# Altium PCB 175-00002 rev 3, PCB, Sinistro Clock Gen.PcbDoc (part 3 of 6)
Units mil, origin at the board's own origin, x right, y up, seen from the top; angles counter-clockwise.
Board outline 5905.51 x 4330.71 mil, 10 copper layers (Top Layer (.GTL), MidLayer1 (*.G1), +12V (*.GP1), -12V (*.GP2), A & GND (*.GP3), Chassis E (*.GP4), +28V & VCC (*.GP5), MidLayer2 (*.G2), MidLayer3 (*.G3), Bottom Layer (.GBL)), stack 64.6 mil thick; 502 components, 332 nets, 1948 pads, 915 vias.
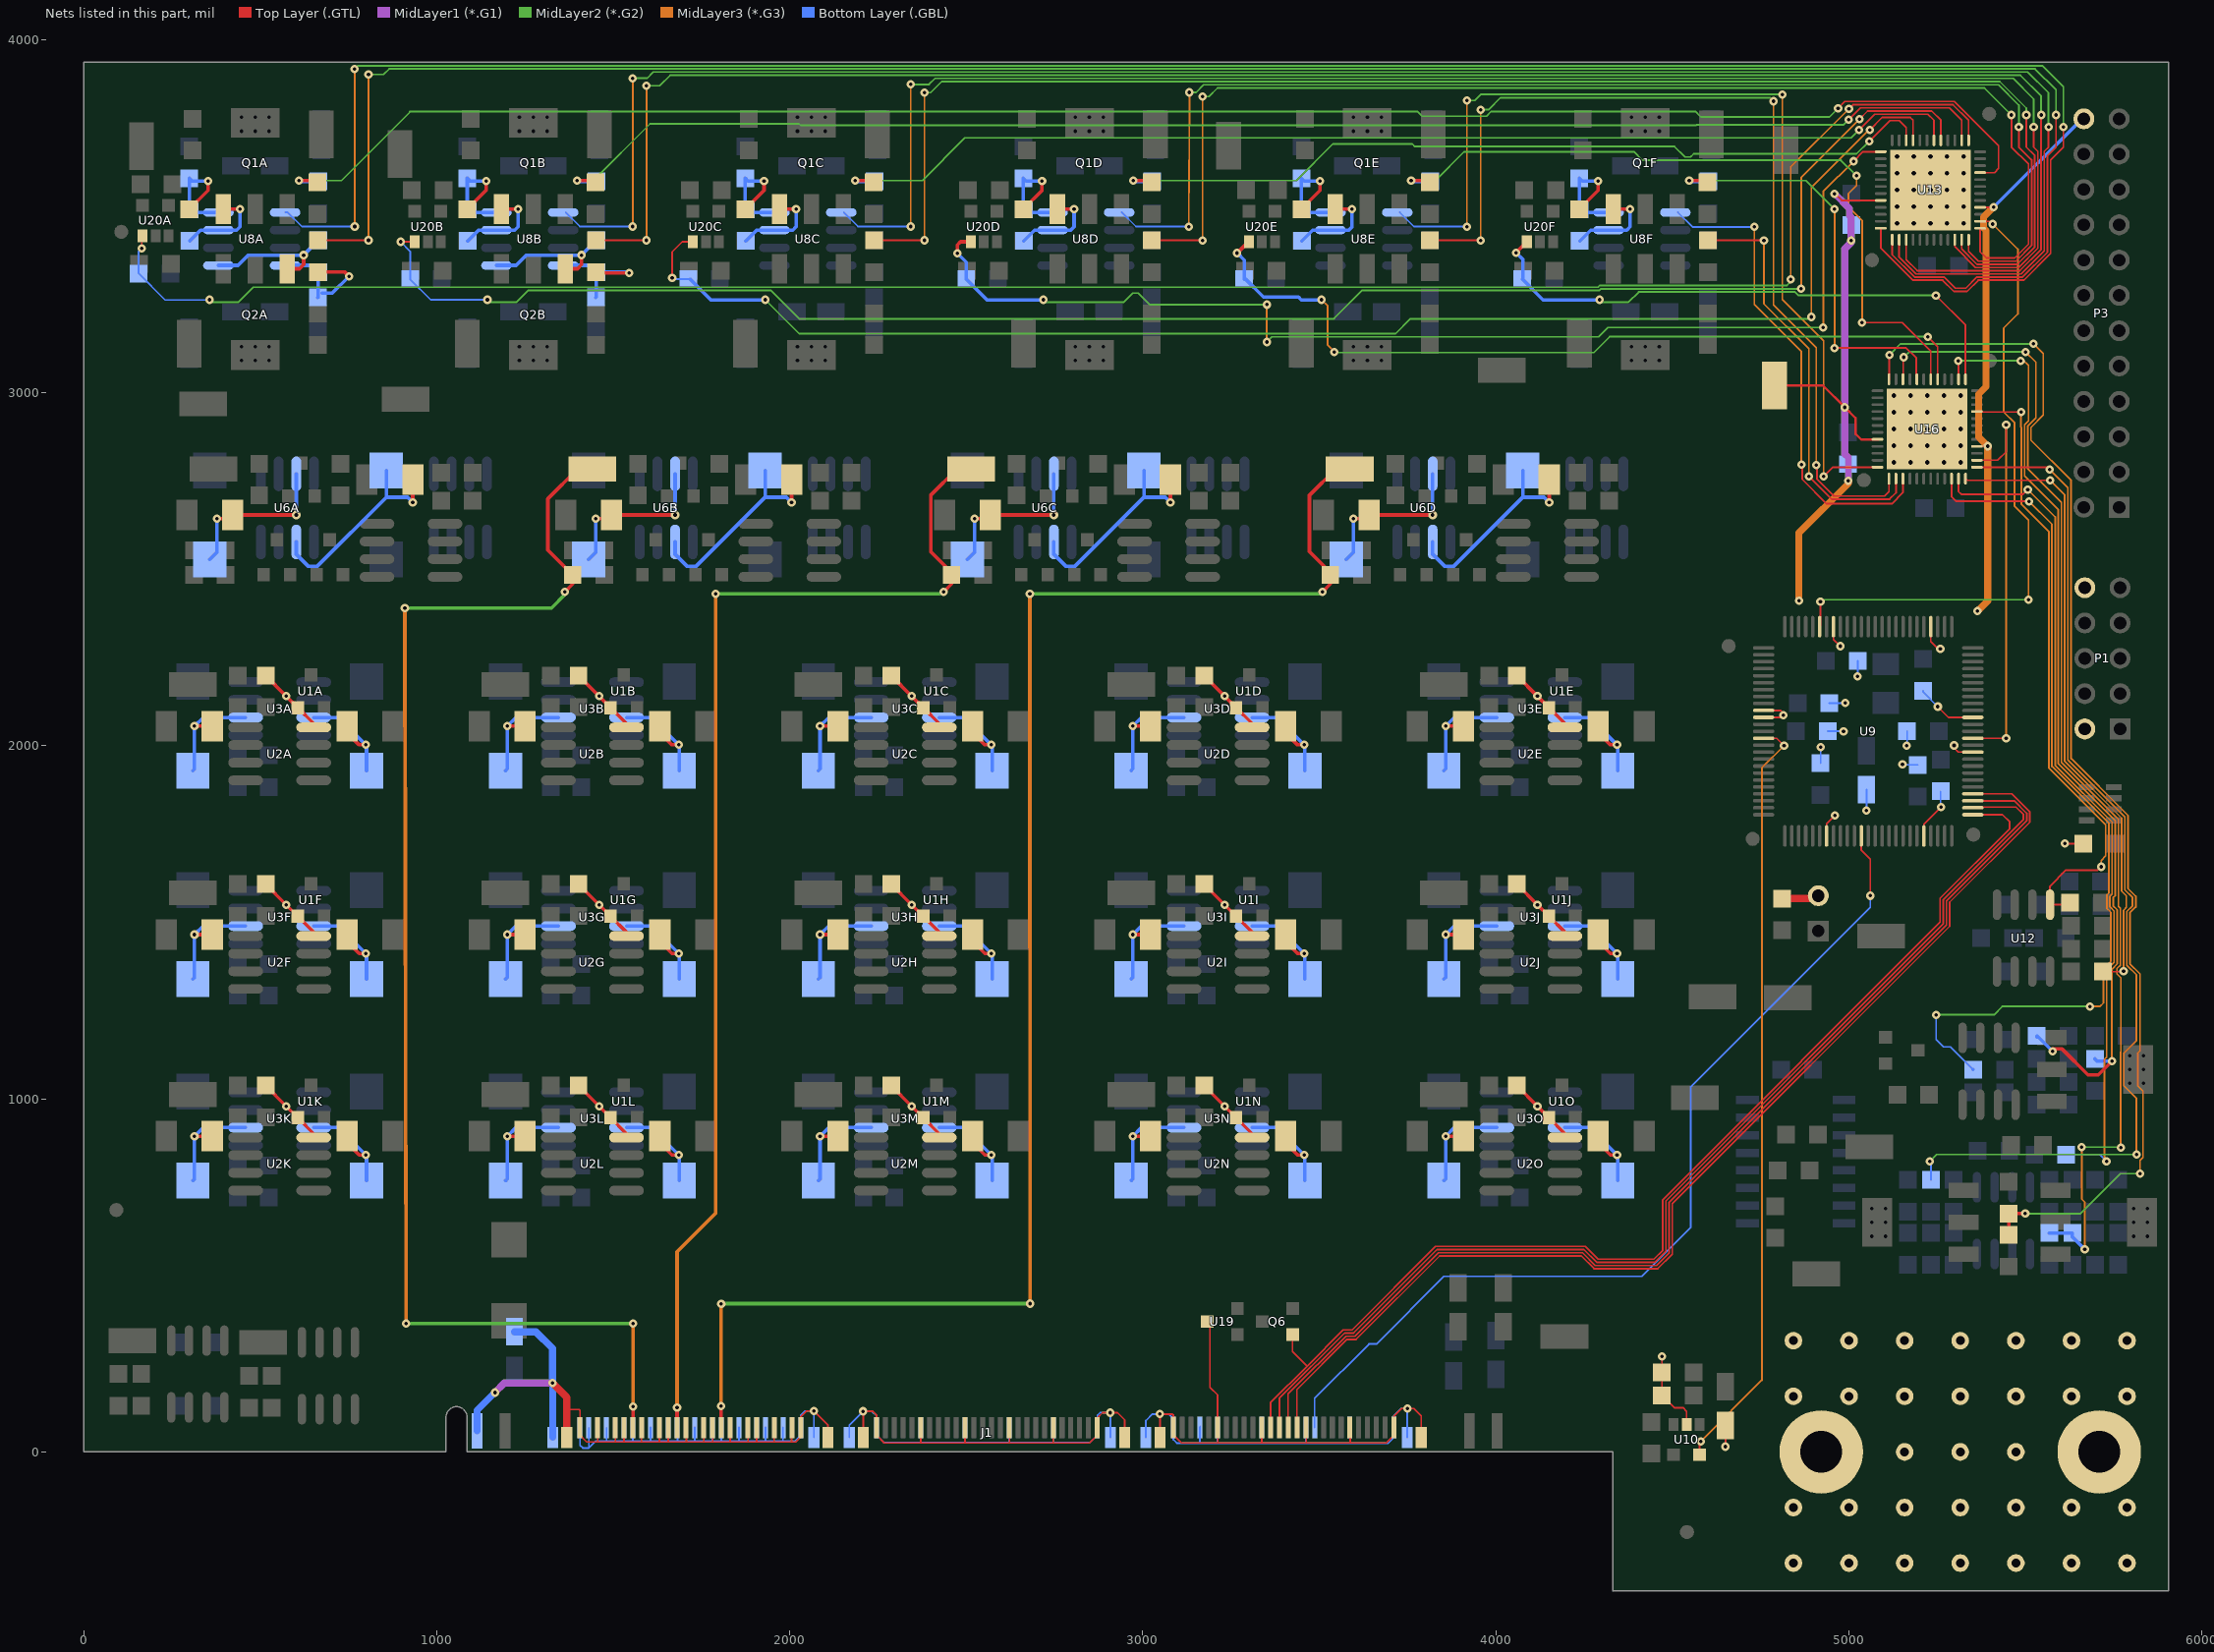
[diagram p11: the nets of this part, all layers, seen from the top]

## Via types
v1: diameter 24, hole 10, Top Layer (.GTL) to Bottom Layer (.GBL), 915 vias

## Nets (pads, with @x,y where several pads share a name; then routed paths per layer and width w, separated by ;. In a path a pad name is that pad's centre, name@x,y a point inside that pad or via, vN(x,y) a via of type N, cw(c..) or ccw(c..) an arc to the next point about the centre after c; other vN are vias at no path point) (continued)
CDO17: J1.143 R4B.2 TP4B.1 | length 3900.4
  Top Layer (.GTL) w10: v1(1362.83,2435) 1385.24,2457.4 R4B.2@1385.24,2483.31 1315,2553.54 1315,2699 1399.31,2783.31 TP4B.1@1440.24,2783.31 ; J1.143@1556,68.09 v1(1556,128)
  MidLayer2 (*.G2) w10: v1(910,2390) 1325,2390 v1@1365,2430 ; v1(913,363) 1515,363 1516,364 v1(1556,364)
  MidLayer3 (*.G3) w10: v1(910,2390) v1(913,363) ; v1(1556,128) v1(1556,364)
CDO18: J1.133 R4C.2 TP4C.1 | length 3509.6
  Top Layer (.GTL) w10: J1.133@1681,68.09 v1(1681,126) ; v1(2435.67,2435) 2458.07,2457.4 R4C.2@2458.07,2483.31 2458.07,2490.58 2399.07,2549.58 2399.07,2709.01 2473.37,2783.31 TP4C.1@2513.07,2783.31
  MidLayer2 (*.G2) w10: v1(1790,2430) v1@2440,2430
  MidLayer3 (*.G3) w10: v1(1681,126) 1681,532 1681,567 1790,676 v1(1790,2430)
CDO19: J1.123 R4D.2 TP4D.1 | length 4519.2
  Top Layer (.GTL) w10: v1(1805,130) 1806,129 J1.123@1806,68.09 ; v1(3508.5,2435) 3530.91,2457.4 R4D.2@3530.91,2483.31 3530.91,2490.58 3471.91,2549.58 3471.91,2709.01 3546.21,2783.31 TP4D.1@3585.91,2783.31
  MidLayer2 (*.G2) w10: v1@1806,420 v1(2681,420) ; v1(2680,2430) v1@3510,2430
  MidLayer3 (*.G3) w10: v1(1805,130) 1805,418 v1(1806,419) ; v1(2680,2430) v1(2681,420)
CLK_100: U9.14 U10.5 | length 2173.5
  Top Layer (.GTL) w5: U10.5@4577,-8 4577,27 v1(4580,30) ; U9.14@4758.15,2020.95 4795.05,2020.95 v1(4816,2000)
  MidLayer3 (*.G3) w5: v1(4580,30) 4753,203 4753,1937 v1(4816,2000)
DAC_HI1: U8A.1 U13.12 | length 6647.7
  Top Layer (.GTL) w5: U13.12@5089.74,3465.22 5089.74,3410.08 5181.82,3318 5265.27,3318 5296.77,3286.5 5334.5,3286.5 5366,3318 5495.1,3318 5571,3393.9 5571,3659 5607,3695 v1(5607,3752)
  MidLayer2 (*.G2) w5: v1(767,3916) 776.5,3925.5 5547.39,3925.5 5607,3865.89 v1(5607,3752)
  MidLayer3 (*.G3) w5: v1(767,3916) 768,3915 v1(768,3470)
  Bottom Layer (.GBL) w5: U8A.1@570.94,3510.04 578.34,3510.04 618.38,3470 v1(768,3470)
DAC_HI2: U8B.1 U13.14 | length 5634.2
  Top Layer (.GTL) w5: U13.14@5141.9,3432.74 5141.9,3383.37 5189.27,3336 5487.64,3336 5553,3401.36 5553,3683 5565,3695 v1(5565,3752)
  MidLayer2 (*.G2) w5: v1(1555.4,3890) 1596,3890 1613.5,3907.5 5505.99,3907.5 5565,3848.49 v1(5565,3752)
  MidLayer3 (*.G3) w5: v1@1548,3890 v1(1555.4,3890) v1(1555.4,3470)
  Bottom Layer (.GBL) w5: U8B.1@1365.74,3510.04 1405.78,3470 v1(1555.4,3470)
DAC_HI3: U8C.1 U13.22 | length 4549.8
  Top Layer (.GTL) w5: U13.22@5299.38,3432.74 5299.38,3413.16 5358.54,3354 5480.18,3354 5535,3408.82 5535,3683 5523,3695 v1(5523,3752)
  MidLayer2 (*.G2) w5: v1(2342.8,3872.49) 2394.49,3872.49 2411.5,3889.5 5464.59,3889.5 5523,3831.1 v1(5523,3752)
  MidLayer3 (*.G3) w5: v1(2342.8,3470) v1(2342.8,3872.49)
  Bottom Layer (.GBL) w5: U8C.1@2153.14,3510.04 2193.18,3470 v1(2342.8,3470)
DAC_HI4: U8D.1 U13.24 | length 3622
  Top Layer (.GTL) w5: U13.24@5338.75,3432.74 5338.75,3399.25 5366,3372 5472.73,3372 5517,3416.27 5517,3659 5481,3695 v1(5481,3752)
  MidLayer2 (*.G2) w5: v1(3132,3850) 3151,3850 3172.5,3871.5 5423.2,3871.5 5481,3813.7 v1(5481,3752)
  MidLayer3 (*.G3) w5: v1(3130.4,3469.78) v1(3132,3850)
  Bottom Layer (.GBL) w5: U8D.1@2940.54,3510.04 2980.58,3470 v1@3130.2,3470
DAC_HI5: U8E.1 U16.12 | length 2757.9
  Top Layer (.GTL) w5: v1(4928,2762) 4954.48,2788.48 U16.12@5080.74,2788.48
  MidLayer2 (*.G2) w5: v1(3917.8,3827) 3940,3827 3957,3844 v1(4811,3844)
  MidLayer3 (*.G3) w5: v1(3917.8,3469.78) v1(3917.8,3827) ; v1(4811,3844) 4811,3264 4928,3147 v1(4928,2762)
  Bottom Layer (.GBL) w5: U8E.1@3727.94,3510.04 3767.98,3470 v1@3917.61,3470
DAC_HI6: U8F.1 U16.15 | length 1370.7
  Top Layer (.GTL) w5: v1(4865,2796) 4867.5,2793.5 4867.5,2754.34 4936.84,2685 5121,2685 5152.59,2716.59 U16.15@5152.59,2756
  MidLayer3 (*.G3) w5: v1(4732,3469) 4732,3249 4865,3116 v1(4865,2796)
  Bottom Layer (.GBL) w5: U8F.1@4515.34,3510.04 4556.38,3469 v1(4732,3469)
DAC_LO1: R10A.2 U13.13 | length 6456.9
  Top Layer (.GTL) w5: R10A.2@663.46,3430.83 806.83,3430.83 v1(807,3431) ; U13.13@5122.22,3432.74 5122.22,3390.32 5185.54,3327 5269,3327 5300.5,3295.5 5330.77,3295.5 5362.27,3327 5491.37,3327 5562,3397.63 5562,3671 5586,3695 v1(5586,3786)
  MidLayer2 (*.G2) w5: v1(807,3901) 850,3901 865.5,3916.5 5526.69,3916.5 5586,3857.19 v1(5586,3786)
  MidLayer3 (*.G3) w5: v1(807,3431) v1(807,3901)
DAC_LO2: R10B.2 U13.15 | length 5478.8
  Top Layer (.GTL) w5: R10B.2@1450.87,3430.83 v1@1594.23,3430.83 ; U13.15@5161.59,3432.74 5161.59,3376.41 5193,3345 5483.91,3345 5544,3405.09 v1(5544,3786)
  MidLayer2 (*.G2) w5: v1(1594.4,3869) 1632,3869 1661.5,3898.5 5485.29,3898.5 5544,3839.79 v1(5544,3786)
  MidLayer3 (*.G3) w5: v1(1594.4,3431) v1(1594.4,3869)
DAC_LO3: R10C.2 U13.23 | length 4400.4
  Top Layer (.GTL) w5: R10C.2@2238.27,3430.83 v1@2381.63,3430.83 ; U13.23@5319.07,3432.74 5319.07,3406.2 5362.27,3363 5476.46,3363 5526,3412.54 5526,3671 5502,3695 v1(5502,3786)
  MidLayer2 (*.G2) w5: v1(2381.8,3849) 2399,3849 2430.5,3880.5 5426.93,3880.5 5502,3805.43 v1(5502,3786)
  MidLayer3 (*.G3) w5: v1(2381.8,3431) v1(2381.8,3849)
DAC_LO4: R10D.2 U13.25 | length 3495.6
  Top Layer (.GTL) w5: R10D.2@3025.67,3430.83 v1@3169.03,3430.83 ; U13.25@5371.24,3465.22 5371.24,3398.76 5389,3381 5469,3381 5508,3420 5508,3647 5460,3695 v1(5460,3786)
  MidLayer2 (*.G2) w5: v1(3169.4,3838) 3187,3838 3211.5,3862.5 5383.5,3862.5 v1(5460,3786)
  MidLayer3 (*.G3) w5: v1(3169.4,3430.78) v1(3169.4,3838)
DAC_LO5: R10E.2 U16.13 | length 2748
  Top Layer (.GTL) w5: R10E.2@3813.07,3430.83 v1@3956.43,3430.83 ; v1(4907,2795) 4909.5,2792.5 4909.5,2754.34 4956.84,2707 5101,2707 5113.22,2719.22 U16.13@5113.22,2756
  MidLayer2 (*.G2) w5: v1(3956.8,3801) 3979,3801 4013,3835 4776,3835 v1(4786,3825)
  MidLayer3 (*.G3) w5: v1(3956.8,3430.78) v1(3956.8,3801) ; v1(4786,3825) 4786,3248 4907,3127 v1(4907,2795)
DAC_LO6: R10F.2 U16.14 | length 1200.9
  Top Layer (.GTL) w5: R10F.2@4600.47,3430.83 v1(4759,3430.83) ; v1(4886,2762) 4950,2698 5115,2698 5132.91,2715.91 U16.14@5132.91,2756
  MidLayer3 (*.G3) w5: v1(4759,3430.83) 4759,3251 4886,3124 v1(4886,2762)
DAC_VDD: R42.1 U16.22 | length 2504
  Top Layer (.GTL) w5: U16.22@5290.39,2756 5290.39,2705.61 5304.15,2691.85 v1(5509.85,2691.85)
  MidLayer2 (*.G2) w5: v1(5246.46,1237.84) 5410.29,1237.84 5433.79,1261.34 5681.33,1261.34 v1@5682,1262
  MidLayer3 (*.G3) w5: v1(5509.85,2691.85) 5574.78,2626.92 5574.78,1940.95 5736,1779.73 5736,1583.12 5729.96,1577.07 5729.96,1539.38 5741.46,1527.88 5741.46,1389.57 5720.5,1368.62 5720.5,1271.5 5711,1262 5682.66,1262 v1(5682,1261.34)
  Bottom Layer (.GBL) w5: v1(5246.46,1237.84) 5246.46,1167.84 5267.46,1146.84 5287.46,1146.84 R42.1@5351.46,1082.84
DAC_VOD: R28.1 U16.25 | length 2941
  Top Layer (.GTL) w5: U16.25@5362.24,2788.48 5561.71,2788.48 v1(5568.59,2781.6)
  MidLayer2 (*.G2) w5: v1(5228.72,822.54) 5248.22,842.04 v1(5814,842.04)
  MidLayer3 (*.G3) w5: v1(5568.59,2781.6) 5619.78,2730.41 5619.78,1959.59 5781,1798.37 5781,1676.64 5781,1591.58 5802.96,1569.62 5802.96,1546.84 5786.46,1530.34 5786.46,1378.39 5814,1350.85 5814,1164.66 5778.38,1129.04 5778.38,1036.63 5814,1001.02 v1(5814,842.04)
  Bottom Layer (.GBL) w5: v1(5228.72,822.54) 5232.21,819.05 R28.1@5232.21,769.92
DAC_VOG: R22.1 U16.24 | length 1782.9
  Top Layer (.GTL) w5: U16.24@5329.76,2756 5334.51,2751.25 v1(5569.25,2751.25) ; R22.1@5719,1360 5776.23,1360 v1(5777.46,1361.23)
  MidLayer3 (*.G3) w5: v1(5569.25,2751.25) 5610.78,2709.71 5610.78,1955.86 5772,1794.64 5772,1587.85 5785,1574.85 5785,1541.61 5777.46,1534.06 v1(5777.46,1361.23)
DAC_VRD: R48.1 U16.23 | length 2385.8
  Top Layer (.GTL) w5: U16.23@5310.07,2756 5310.07,2719.93 5318,2712 5493,2712 v1(5506.2,2725.2)
  MidLayer2 (*.G2) w5: v1@5728.54,822.54 v1(5729,823)
  MidLayer3 (*.G3) w5: v1(5506.2,2725.2) 5583.78,2647.62 5583.78,1944.67 5745,1783.46 5745,1579.39 5738.96,1573.35 5738.96,1543.11 5750.46,1531.61 5750.46,1385.85 5729.5,1364.89 5729.5,1118.04 5722.96,1111.5 5722.96,829.04 v1(5729,823)
  Bottom Layer (.GBL) w5: R48.1@5615,842.04 5709.96,842.04 v1(5729,823)
DRV_SEL_N: J1.29 Q6.1 U9.51 | length 3269.6
  Top Layer (.GTL) w5: J1.29@3361.5,69.15 3361.5,139.58 3464.96,243.04 ; Q6.1@3424,332 3424,284 3464.96,243.04 ; 4472.5,612.5 4472.5,571.34 ; U9.51@5350.67,1804.41 5434.59,1804.41 5455.09,1783.91 5455.09,1764.91 5258,1567.82 5258,1499.82 4472.5,714.32 4472.5,571.34 ; 3464.96,243.04 3567.43,345.5 3592.9,345.5 3829.27,581.87 4252.95,581.87 4288.82,546 4447.16,546 4472.5,571.34
E: pad.0 pad.1 pad.2 pad.3 pad.4 pad.5 U13.0 U16.0
GND: C7.2 C12.1 C16.1 C17.1 C18.1 C19.1 C20.1 C21.1 C23.1 C24.1 C26.1 C31.1 C32.2 C34.1 C36.1 C55.2 C56.2 J1.1 J1.2 J1.11 J1.12 J1.21 J1.22 J1.31 J1.32 J1.41 J1.42 J1.46 J1.51 J1.52 J1.53 J1.54 J1.63 J1.64 J1.73 J1.74 J1.83 J1.84 J1.93 J1.94 J1.103 J1.104 J1.105 J1.106 J1.107 J1.110 J1.111 J1.114 J1.115 J1.116 J1.117 J1.120 J1.121 J1.124 J1.125 J1.126 J1.127 J1.130 J1.131 J1.134 J1.135 J1.136 J1.137 J1.140 J1.141 J1.144 J1.145 J1.146 J1.147 J1.150 J1.151 J1.154 J1.155 J1.156 J1.157 J1.158 J1.159 J1.160 J1.161 J1.162 J1.163 J1.164 J1.165 J1.166 J1.167 J1.168 J1.PC08 P1.2 P1.10 P2.2 P3.24 TP15.1 U9.10 U9.11 U9.32 U9.46 U9.60 U9.65 U9.79 U9.93 U10.2 U13.8 U13.28 U16.8 U16.28 U19.3 | length 14068.1
  Top Layer (.GTL) w5: 1368.5,120 1403,120 1406,117 J1.155@1406,68.09 1403,65.08 1403,49.9 1424.9,28 1456,28 ; J1.151@1456,68.09 1456,28 ; J1.147@1506,46.9 J1.147@1506,68.09 1506,28.01 ; J1.145@1531,68.09 1531,28 ; J1.141@1580,68.09 1580,28 ; J1.137@1631,68.09 1631,28 ; J1.135@1656,68.09 1656,28 ; J1.131@1707,68.09 1707,28 ; J1.127@1757,68.09 1757,28 ; J1.125@1782,68.09 1782,28 ; J1.121@1831,68.09 1831,28 ; J1.117@1882,68.09 1882,28 ; J1.115@1906,68.09 1906,28 ; J1.111@1956,68.09 1956,28 ; J1.107@2005,68.09 2005,28 ; J1.105@2031,42.01 2017,28 2005,28 ; J1.105@2031,68.09 2031,99 2048,116 v1(2068,116) 2108.5,75.5 J1.165@2108.5,41.09 ; J1.163@2208.5,41.09 2208.5,114.5 v1(2208,115) 2235,115 2246.16,103.84 J1.103@2246.16,68.09 2246.16,46.9 2267.9,25.16 2849.43,25.16 2871.16,46.9 J1.53@2871.16,68.09 2871.16,96.16 2886,111 v1(2908,111) 2928,111 2948.5,90.5 J1.161@2948.5,41.09 ; 2371,25.16 J1.93@2371,73.08 ; 2496,25.16 J1.83@2496,73.09 ; 2622,25.16 J1.73@2622,73.09 ; 2746,25.16 J1.63@2746,73.09 ; v1(3048,107) v1@3048.5,106.5 ; J1.159@3048.5,41.09 v1@3048.5,106.5 ; U19.3@3182,369 3190,361 3190,183 3211.5,161.5 J1.41@3211.5,69.15 ; J1.41@3212,74.09 3212,25.5 ; J1.31@3337,74.09 3337,25.5 ; J1.21@3463,74.09 3463,25.5 ; J1.11@3587,74.09 3587,25.5 ; J1.157@3788.5,41.09 3788.5,102.5 3768,123 v1(3749,123) 3733,123 3711.5,101.5 J1.1@3711.5,69.15 3711.5,47.96 3689.05,25.5 3587,25.5 ; v1(4470,270) C12.1@4470,225 C16.1@4470,160 4505,125 4530,125 4540,115 U10.2@4540,78 ; v1(4650,15) C7.2@4650,75 ; U9.11@4758.15,2080 4807.78,2080 v1(4814.41,2086.63) 4814.41,2091.63 4806.35,2099.69 U9.10@4758.15,2099.69 ; TP15.1@4789,3020 4878,3020 ; P2.2@4905,1567 P2.2@4913,1575 ; U9.32@4936.3,1744.37 4936.3,1778.52 v1(4960.41,1802.63) ; U9.93@4955.98,2336.89 4955.98,2301.05 v1(4975.41,2281.63) ; v1@4960,3563 4979.04,3543.96 U13.8@5089.74,3543.96 ; U9.46@5211.89,1744.37 5211.89,1777.11 v1(5260.41,1825.63) ; U9.79@5231.57,2336.89 5231.57,2294.46 5252.41,2273.63 v1(5258.41,2273.63) ; v1(5251.41,2110.63) 5282.04,2080 U9.65@5350.67,2080 ; v1(5297.41,2000.63) 5297.41,1993.63 5309.46,1981.58 U9.60@5350.67,1981.58 ; U16.28@5362.24,2847.54 5392.54,2847.54 v1(5393,2848) ; U13.28@5371.24,3524.28 5408.27,3524.28 v1(5409,3525) ; v1(5611,1723) 5611.29,1722.71 C17.1@5664,1722.71 ; 1456,28 1506,28 ; 1506,28 1531,28 ; 1531,28 1580,28 ; 1580,28 1631,28 ; 1631,28 1656,28 ; 1656,28 1707,28 ; 1707,28 1757,28 ; 1757,28 1782,28 ; 1782,28 1831,28 ; 1831,28 1882,28 ; 1882,28 1906,28 ; 1906,28 1956,28 ; 1956,28 2005,28 ; v1@3048.5,106.5 3084.5,106.5 3086.5,104.5 J1.51@3086.5,69.15 3086.5,47.96 3108.96,25.5 3212,25.5 ; 3212,25.5 3337,25.5 ; 3337,25.5 3463,25.5 ; 3463,25.5 3587,25.5
  Top Layer (.GTL) w7: TP15.1@4789,3020 4926,3020 v1(4988,2958) 5018.5,2927.5 5018.5,2882.85 5034.59,2866.76 5080.28,2866.76 U16.8@5080.74,2867.22
  Top Layer (.GTL) w20: v1(1328,195) 1368.5,154.5 1368.5,120 J1.167@1368.5,41.09 ; C56.2@4811,1567 P2.2@4905,1567
  MidLayer1 (*.G1) w20: v1(1165,168) 1192,195 v1(1328,195) ; v1(4959,3563) 5001.16,3520.84 5001.16,3501.61 ; v1(4998,2750.26) 4998,2815.77 4988,2825.77 v1(4988,2958) 4988,3406.77 v1@5006,3424.77 ; v1(5006,3430) 5006,3496.77
  MidLayer3 (*.G3) w20: v1(4858,2410) 4858,2602.33 4998,2742.33 v1(4998,2750.26) ; v1(5364,2381) 5393,2410 v1(5393,2848) 5367,2874 5367,2995.23 5388,3016.23 5388,3459.23 5381,3466.23 5381,3497 v1(5409,3525)
  Bottom Layer (.GBL) w5: J1.156@1406,68.09 1406,19 1414.01,11 1431,11 ; J1.154@1431,68.09 1431,11 ; 1481,32 J1.150@1481,68.09 ; 1531,31 J1.146@1531,69.09 ; 1556,31 J1.144@1556,69.09 ; 1606,31 J1.140@1606,70.09 ; 1656,31 J1.136@1656,69.09 ; 1682,31 J1.134@1682,68.09 ; 1731,31 J1.130@1731,69.09 ; 1781,31 J1.126@1781,69.09 ; 1806,31 J1.124@1806,69.09 ; 1856,31 J1.120@1856,69.09 ; 1906,31 J1.116@1906,69.09 ; 1931,31 J1.114@1931,70.09 ; 1981,31 J1.110@1981,70.09 ; J1.166@2068.5,41.09 2068.5,115.5 v1(2068,116) 2043,116 2031,104 J1.106@2031,68.09 2031,46.89 2015.11,31 1451,31 1431,11 ; J1.164@2168.5,41.09 2168.5,75.5 v1(2208,115) 2233,115 2246.16,101.84 J1.104@2246.16,68.09 2246.16,46.9 2267.06,26 2850.27,26 2872,47.73 2872,67.25 J1.54@2871.16,68.09 2871.16,103.16 2879,111 v1(2908,111) 2908.5,110.5 J1.162@2908.5,41.09 ; 2371,26 J1.94@2371,70.08 ; 2496,26 J1.84@2496,70.08 ; 2621,26 J1.74@2621,70.08 ; 2746,26 J1.64@2746,70.08 ; J1.160@3008.5,41.09 3008.5,88.5 3027,107 v1(3048,107) 3073,107 3086.5,93.5 J1.52@3086.5,69.15 3086.5,34.5 3096,25 3695,25 3711.5,41.5 J1.2@3711.5,69.15 3711.5,103.5 3731,123 v1(3749,123) 3748.5,122.5 J1.158@3748.5,41.09 ; 3161.5,26.5 J1.46@3161.5,69.15 ; J1.46@3162,48.45 J1.46@3162,72.08 ; 3211.5,25.5 J1.42@3211.5,69.15 ; J1.42@3212,47.46 J1.42@3212,72.08 ; 3336.5,27.5 J1.32@3336.5,69.15 ; J1.32@3337,48.45 J1.32@3337,72.08 ; J1.22@3461,48.46 J1.22@3461,72.08 ; 3461.5,26.5 J1.22@3461.5,69.15 ; J1.12@3586,47.45 J1.12@3586,72.08 ; 3586.5,25.5 J1.12@3586.5,69.15 ; C18.1@4919.41,1950.63 v1(4919.41,1995.63) ; C26.1@4939.41,2040.63 v1(4984.41,2040.63) ; C19.1@4944.41,2120.63 v1(4989.41,2120.63) ; v1@4997,2751.26 C36.1@4997,2797.26 ; v1(5006,3430) C34.1@5006,3474 ; v1(5024.41,2195.63) C23.1@5024.41,2240.63 ; v1(5049.41,1816.63) C32.2@5049.41,1875.63 ; v1(5151.41,1946.63) 5152.41,1945.63 C20.1@5194.41,1945.63 ; v1(5163.41,1999.63) 5164.41,2000.63 C31.1@5164.41,2040.63 ; C21.1@5209.41,2155.63 5209.41,2152.63 v1(5251.41,2110.63) ; C24.1@5259.41,1870.63 5259.41,1826.63 v1(5260.41,1825.63)
  Bottom Layer (.GBL) w10: v1(5409,3525) 5409.7,3525 5659.7,3775 P3.24@5665,3775
  Bottom Layer (.GBL) w20: J1.PC08@1114.6,59.15 1114.6,117.6 v1(1165,168) ; C55.2@1220,340 1281,340 1328,293 v1(1328,195) 1328.5,194.5 J1.168@1328.5,41.09
I_ADDR0: J1.23 U9.54 | length 3213
  Top Layer (.GTL) w5: J1.23@3436.5,69.15 3436.5,176.4 3578.61,318.5 3604.09,318.5 3840.45,554.87 4241.77,554.87 4277.64,519 4314,519 4458.35,519 4499.5,560.15 4499.5,703.14 5285,1488.64 5285,1556.64 5512,1783.64 5512,1812.36 5460.9,1863.47 U9.54@5350.67,1863.47
I_ADDR1: J1.25 U9.53 | length 3241.5
  Top Layer (.GTL) w5: J1.25@3411.5,69.15 3411.5,164.12 3574.88,327.5 3600.36,327.5 3836.73,563.87 4245.5,563.87 4281.37,528 4314,528 4454.62,528 4490.5,563.88 ; 4490.5,605.04 4490.5,563.88 ; U9.53@5350.67,1843.78 5467.85,1843.78 5503,1808.63 5503,1787.37 5276,1560.37 5276,1492.37 4490.5,706.87 4490.5,563.88
I_ADDR2: J1.27 U9.52 | length 3230.3
  Top Layer (.GTL) w5: J1.27@3386.5,69.15 3386.5,151.85 3571.15,336.5 3596.63,336.5 3833,572.87 4249.23,572.87 4285.1,537 4314,537 4450.89,537 4481.5,567.61 ; 4481.5,608.77 4481.5,567.61 ; U9.52@5350.67,1824.1 5352.57,1826 5472.91,1826 5494,1804.9 5494,1791.1 5267,1564.1 5267,1496.1 4481.5,710.6 4481.5,567.61
LOAD_MAX1_N: U9.95 U13.26 | length 1841.2
  Top Layer (.GTL) w5: U9.95@4916.61,2336.89 4919,2339.28 v1(4919,2408) ; U13.26@5371.24,3484.91 5399.09,3484.91 v1(5407,3477)
  MidLayer2 (*.G2) w5: v1(4919,2408) 4924,2413 v1(5508,2413)
  MidLayer3 (*.G3) w5: v1(5407,3477) 5478,3406 5478,3222.33 5438,3182.33 5438,2945.27 5469,2914.27 5469,2677.54 5508,2638.54 v1(5508,2413)
LOAD_MAX2_N: U9.62 U16.26 | length 1151.9
  Top Layer (.GTL) w5: U9.62@5350.67,2020.95 5350.72,2021 v1(5445,2021) ; U16.26@5362.24,2808.17 5420.97,2808.17 5445,2832.2 v1(5445,2909)
  MidLayer3 (*.G3) w5: v1(5445,2021) v1(5445,2909)
MON_HI1: R13A.1 R14A.2 U13.33 | length 5214
  Top Layer (.GTL) w5: v1(4969,3805) 4988,3824 5298.48,3824 5423.5,3698.98 5423.5,3634.5 5411.7,3622.7 U13.33@5371.24,3622.7
  Top Layer (.GTL) w10: v1(610.31,3600.39) 661.22,3600.39 R13A.1@663.46,3598.15
  MidLayer2 (*.G2) w5: v1(610.31,3600.39) 730.39,3600.39 923,3793 924.25,3796.03 3777.48,3796.03 3791.01,3782.5 3973.23,3782.5 3986.75,3796.03 4564.89,3796.03 4580.91,3780 4944,3780 v1(4969,3805)
  Bottom Layer (.GBL) w10: v1(610.31,3600.39) 612.56,3598.15 R14A.2@664.88,3598.15
MON_HI2: R13B.1 R14B.2 U13.38 | length 4190.6
  Top Layer (.GTL) w5: v1(4998.95,3773.05) 5031.9,3806 5284.07,3806 5319.07,3771 U13.38@5319.07,3714.24
  Top Layer (.GTL) w10: v1(1397.72,3600.39) 1448.62,3600.39 R13B.1@1450.87,3598.15
  MidLayer2 (*.G2) w5: v1(1397.72,3600.39) 1443.79,3600.39 1604.4,3761 2026.68,3761 2030.65,3757.03 4566.88,3757.03 4567.85,3758 4983.9,3758 v1(4998.95,3773.05)
  Bottom Layer (.GBL) w10: v1(1397.72,3600.39) 1399.96,3598.15 R14B.2@1452.28,3598.15
MON_HI3: R13C.1 R14C.2 U13.42 | length 3306.3
  Top Layer (.GTL) w5: v1(5028.65,3743.35) 5073.3,3788 5223.33,3788 5240.33,3771 U13.42@5240.33,3714.24
  Top Layer (.GTL) w10: v1(2185.12,3600.39) 2236.02,3600.39 R13C.1@2238.27,3598.15
  MidLayer2 (*.G2) w5: v1(2185.12,3600.39) 2375.39,3600.39 2496,3721 5006.3,3721 v1(5028.65,3743.35)
  Bottom Layer (.GBL) w10: v1(2185.12,3600.39) 2187.36,3598.15 R14C.2@2239.68,3598.15
MON_HI4: R13D.1 R14D.2 U13.46 | length 2443.8
  Top Layer (.GTL) w5: v1(5057,3712) 5058,3712 5116,3770 5142,3770 5161.59,3750.41 U13.46@5161.59,3714.24
  Top Layer (.GTL) w10: v1(2972.52,3600.39) 3023.43,3600.39 R13D.1@3025.67,3598.15
  MidLayer2 (*.G2) w5: v1(2972.52,3600.39) 3434.55,3600.39 3537.97,3703.82 3763.37,3703.82 3770.61,3696.58 4505.69,3696.58 4535.45,3666.82 4550.77,3666.82 4559.96,3676 5021,3676 v1(5057,3712)
  Bottom Layer (.GBL) w10: v1(2972.52,3600.39) 2974.76,3598.15 R14D.2@3027.08,3598.15
MON_HI5: R13E.1 R14E.2 U16.42 | length 2182.1
  Top Layer (.GTL) w5: v1(5037,3198) 5151,3198 5231.33,3117.67 U16.42@5231.33,3037.5
  Top Layer (.GTL) w10: v1(3759.92,3600.39) 3810.83,3600.39 R13E.1@3813.07,3598.15
  MidLayer2 (*.G2) w5: v1(3759.92,3600.39) 3828.6,3600.39 3910.2,3682 4391,3682 4415.18,3657.82 4977.18,3657.82 v1(5021,3614)
  MidLayer3 (*.G3) w5: v1(5021,3614) 5021,3586.25 4998,3563.25 4998,3526 5037,3487 v1(5037,3198)
  Bottom Layer (.GBL) w10: v1(3759.92,3600.39) 3762.16,3598.15 R14E.2@3814.48,3598.15
MON_HI6: R13F.1 R14F.2 U16.44 | length 1251.9
  Top Layer (.GTL) w5: v1(4959,3126) 5162,3126 5190.5,3097.5 5190.5,3038.96 U16.44@5191.96,3037.5
  Top Layer (.GTL) w10: v1(4547.32,3600.39) 4598.23,3600.39 R13F.1@4600.47,3598.15
  MidLayer2 (*.G2) w5: v1(4547.32,3600.39) 4877.61,3600.39 v1(4959,3519)
  MidLayer3 (*.G3) w5: v1(4959,3126) v1(4959,3519)
  Bottom Layer (.GBL) w10: v1(4547.32,3600.39) 4549.57,3598.15 R14F.2@4601.89,3598.15
MON_LO1: R23A.1 U13.37 U20A.1 | length 5825.2
  Top Layer (.GTL) w5: v1(165,3408) 165,3442 U20A.1@167,3444 ; v1(4999.6,3803.4) 5011.21,3815 5294.75,3815 5338.75,3771 U13.37@5338.75,3714.24
  MidLayer2 (*.G2) w5: v1(356.38,3262.8) 363.07,3256.11 438.84,3256.11 481.17,3298.43 4289.24,3298.43 4293.81,3303 4824,3303 4835,3314 v1(4835,3320)
  MidLayer3 (*.G3) w5: v1(4835,3320) 4835,3638.79 v1(4999.6,3803.4)
  Bottom Layer (.GBL) w5: v1(165,3408) 156,3399 R23A.1@156,3337 230.91,3262.09 v1@355.67,3262.09
  Bottom Layer (.GBL) w10: v1@355.67,3262.09 v1(356.38,3262.8)
MON_LO2: R23B.1 U13.41 U20B.1 | length 5063
  Top Layer (.GTL) w5: v1(898,3427) U20B.1@938,3427 ; v1(5029.3,3773.7) 5052.6,3797 5234.01,3797 5260.01,3771 U13.41@5260.01,3714.24
  MidLayer2 (*.G2) w5: v1(1143.78,3262.8) 1150.47,3256.11 1226.24,3256.11 1259.57,3289.43 1946.57,3289.43 2027.14,3208.86 3541.21,3208.86 3621.77,3289.43 4292.97,3289.43 4296.64,3293.11 4375.85,3293.11 4376.37,3293.63 v1(4864.32,3293.63)
  MidLayer3 (*.G3) w5: v1(4864.32,3293.63) 4864.32,3608.72 v1(5029.3,3773.7)
  Bottom Layer (.GBL) w5: v1(898,3427) 925,3400 R23B.1@925,3321 983.2,3262.8 v1(1143.78,3262.8)
  Bottom Layer (.GBL) w10: v1@1143.07,3262.09 v1(1143.78,3262.8)
MON_LO3: R23C.1 U13.45 U20C.1 | length 4252.7
  Top Layer (.GTL) w5: v1(1667,3325) 1667,3398 1696,3427 U20C.1@1725.4,3427 ; v1(5059,3744) 5094,3779 5173.27,3779 5181.27,3771 U13.45@5181.27,3714.24
  MidLayer2 (*.G2) w5: v1(1931.18,3262.8) 2027.44,3166.54 3715.42,3166.54 3757.74,3208.86 4887.86,3208.86 v1(4893,3214)
  MidLayer3 (*.G3) w5: v1(4893,3214) 4893,3581 5056,3744 v1(5059,3744)
  Bottom Layer (.GBL) w5: v1(1667,3325) 1671,3321 R23C.1@1712.4,3321 R23C.1@1718,3321
  Bottom Layer (.GBL) w10: R23C.1@1718,3321 1776.91,3262.09 1930.47,3262.09 v1(1931.18,3262.8)
MON_LO4: R23D.1 U13.1 U20D.1 | length 3344.7
  Top Layer (.GTL) w5: v1(5013,3655) 5039.75,3681.76 U13.1@5089.74,3681.76
  Top Layer (.GTL) w10: v1(2475,3394) 2475,3418 2484,3427 U20D.1@2512.8,3427
  MidLayer2 (*.G2) w5: v1(2718.58,3262.8) 2725.27,3256.11 2946.56,3256.11 2971.75,3281.3 2987.07,3281.3 3019.37,3249 v1(3351,3249) ; v1(3351,3143) 3365.54,3157.54 4291.06,3157.54 4317.52,3184 v1(4927,3184)
  MidLayer3 (*.G3) w5: v1(3351,3143) v1(3351,3249) ; v1(4927,3184) 4927,3569 v1(5013,3655)
  Bottom Layer (.GBL) w10: v1(2475,3394) 2499.8,3369.2 R23D.1@2499.8,3321 2558.72,3262.09 2717.87,3262.09 v1(2718.58,3262.8)
MON_LO5: R23E.1 U16.41 U20E.1 | length 2365.2
  Top Layer (.GTL) w5: v1(5223,3158) 5251.02,3129.98 U16.41@5251.02,3037.5
  Top Layer (.GTL) w10: v1(3267,3395) 3299,3427 U20E.1@3300.2,3427
  MidLayer2 (*.G2) w5: v1(3542,3115) 3543.58,3113.42 4277.42,3113.42 4322,3158 v1(5223,3158)
  MidLayer3 (*.G3) w5: v1(3505.98,3262.8) 3523.5,3245.28 3523.5,3134.5 v1@3542,3116
  Bottom Layer (.GBL) w10: v1(3267,3395) 3287.21,3374.79 R23E.1@3287.21,3321 3291,3321 3342,3270 3440.98,3270 3448.9,3262.09 v1@3505.27,3262.09
MON_LO6: R23F.1 U16.37 U20F.1 | length 1614
  Top Layer (.GTL) w5: v1(5246,3275) 5329.76,3191.24 U16.37@5329.76,3037.5
  Top Layer (.GTL) w10: v1(4057,3396) 4057,3396.39 U20F.1@4087.61,3427
  MidLayer2 (*.G2) w5: v1(4293.39,3262.8) 4300.08,3256.11 4375.85,3256.11 4404.37,3284.63 4847.16,3284.63 4856.66,3275.13 5245.87,3275.13 v1(5246,3275)
  Bottom Layer (.GBL) w10: v1(4057,3396) 4076,3377 4076,3322.39 R23F.1@4074.61,3321 4133.52,3262.09 4292.68,3262.09 v1(4293.39,3262.8)
MON_VDD: R43.1 R44.1 U16.38 | length 2698.3
  Top Layer (.GTL) w5: v1(5309,3090) 5310.07,3088.93 U16.38@5310.07,3037.5
  Top Layer (.GTL) w10: v1(5576.46,1134.84) 5576.46,1140.84 5603.46,1140.84 5676.46,1067.84 5705.46,1067.84 v1(5744.46,1106.84)
  MidLayer2 (*.G2) w5: v1(5309,3090) 5487,3090 v1@5491,3094
  MidLayer3 (*.G3) w5: v1(5486,3089) 5491,3094 5508,3077 5508,2919.46 5497,2908.46 5497,2764.1 5592.78,2668.31 5592.78,1948.4 5754,1787.18 5754,1665.46 5754,1575.66 5747.96,1569.62 5747.96,1546.84 5759.46,1535.34 5759.46,1382.12 5744.46,1367.12 v1(5744.46,1106.84)
  Bottom Layer (.GBL) w10: R43.1@5531.46,1175.56 R43.1@5531.46,1177.84 5533.46,1177.84 v1(5576.46,1134.84) ; R44.1@5696.46,1112.83 5702.46,1106.84 v1(5744.46,1106.84)
MON_VOD: R31.1 R32.2 U16.48 | length 3507
  Top Layer (.GTL) w5: U16.48@5113.22,3037.5 5114,3038.28 v1(5114,3106)
  Top Layer (.GTL) w10: R31.1@5452.22,614.92 R32.2@5452.22,674.92 v1(5499.09,674.92)
  MidLayer2 (*.G2) w5: v1(5114,3106) 5145.7,3137.7 v1(5522.7,3137.7) ; v1(5499.09,674.92) 5655.26,674.92 5768.34,788 v1(5824,788)
  MidLayer3 (*.G3) w5: v1@5493.22,680.8 v1(5499.09,674.92) ; v1(5522.7,3137.7) 5550,3110.4 5550,2936 5515,2901 5515,2864.89 5628.78,2751.11 5628.78,1963.31 5790,1802.1 5790,1680.37 5790,1595.3 5811.96,1573.35 5811.96,1543.11 5795.46,1526.61 5795.46,1382.12 5824,1353.58 5824,1135.29 5817.75,1129.04 5817.75,1036.63 5832.5,1021.89 5832.5,834.38 5824,825.88 v1(5824,788)
MON_VOG: R26.2 U12.5 U16.33 | length 1801
  Top Layer (.GTL) w5: U16.33@5363.77,2947.5 U16.33@5362.24,2945.96 5363.2,2945 v1(5487,2945) ; R26.2@5626,1555 5620.49,1549.49 U12.5@5569,1549.49 5569,1602 5614.5,1647.5 5704.5,1647.5 v1(5714,1657)
  MidLayer3 (*.G3) w5: v1(5487,2945) 5487,2902 5488,2901 5488,2733.16 5487.7,2732.86 5487.7,2684.3 5565.78,2606.22 5565.78,1937.22 5727,1776 5727,1687.77 5714,1674.77 v1(5714,1657) v1@5714,1656
MON_VRD: R34.2 R35.1 U16.46 | length 3339.7
  Top Layer (.GTL) w5: U16.46@5152.59,3037.5 5153.5,3038.41 5153.5,3098.5 v1(5155,3100)
  Top Layer (.GTL) w10: v1(5667.72,573.54) v1@5669.24,572.02
  MidLayer2 (*.G2) w5: v1(5155,3100) 5170,3115 v1(5500,3115) ; v1(5659,863) 5769,863 v1(5770,862)
  MidLayer3 (*.G3) w5: v1(5500,3115) 5529,3086 5529,2927.73 5506,2904.73 5506,2784.79 5601.78,2689.01 5601.78,1952.13 5763,1790.91 5763,1544.52 5768.46,1539.06 5768.46,1378.39 5758.96,1368.89 5758.96,1353.56 5770,1342.52 5770,1133.38 5769.38,1132.77 5769.38,862.62 v1(5770,862) ; v1(5659,863) 5659.22,862.78 5659.22,715.88 5667.72,707.38 v1(5667.72,573.54)
  Bottom Layer (.GBL) w10: R34.2@5567.22,619.92 R35.1@5632.21,619.92 5632.21,609.05 v1(5667.72,573.54)
MPP: J1.20 U9.37 | length 2677.8
  Top Layer (.GTL) w5: U9.37@5034.72,1744.37 5034.72,1703.36 5060,1678.08 v1(5060,1575)
  Bottom Layer (.GBL) w5: J1.20@3486.5,69.15 3486.5,151.58 3640.43,305.5 3661.4,305.5 3852.9,497 4412.9,497 4552,636.1 4552,1034 5060,1542 v1(5060,1575)
NetC1A_pos: C1A.POS L1A.2 U3A.6 | length 333
  Top Layer (.GTL) w10: v1(314.29,2055.39) L1A.2@364.53,2055.39
  Bottom Layer (.GBL) w10: C1A.POS@309.37,1929.39 314.29,1934.31 v1(314.29,2055.39) 338.5,2079.61 U3A.6@458.98,2079.61
NetC1B_pos: C1B.POS L1B.2 U3B.6 | length 333
  Top Layer (.GTL) w10: v1(1200.12,2055.39) L1B.2@1250.35,2055.39
  Bottom Layer (.GBL) w10: C1B.POS@1195.2,1929.39 1200.12,1934.31 v1(1200.12,2055.39) 1224.33,2079.61 U3B.6@1344.8,2079.61
NetC1C_pos: C1C.POS L1C.2 U3C.6 | length 333
  Top Layer (.GTL) w10: v1(2085.95,2055.39) L1C.2@2136.18,2055.39
  Bottom Layer (.GBL) w10: C1C.POS@2081.02,1929.39 2085.95,1934.31 v1(2085.95,2055.39) 2110.16,2079.61 U3C.6@2230.63,2079.61
NetC1D_pos: C1D.POS L1D.2 U3D.6 | length 333
  Top Layer (.GTL) w10: v1(2971.77,2055.39) L1D.2@3022.01,2055.39
  Bottom Layer (.GBL) w10: C1D.POS@2966.85,1929.39 2971.77,1934.31 v1(2971.77,2055.39) 2995.98,2079.61 U3D.6@3116.46,2079.61
NetC1E_pos: C1E.POS L1E.2 U3E.6 | length 333
  Top Layer (.GTL) w10: v1(3857.6,2055.39) L1E.2@3907.83,2055.39
  Bottom Layer (.GBL) w10: C1E.POS@3852.68,1929.39 3857.6,1934.31 v1(3857.6,2055.39) 3881.81,2079.61 U3E.6@4002.28,2079.61
NetC1F_pos: C1F.POS L1F.2 U3F.6 | length 333
  Top Layer (.GTL) w10: v1(314.29,1464.84) L1F.2@364.53,1464.84
  Bottom Layer (.GBL) w10: C1F.POS@309.37,1338.84 314.29,1343.76 v1(314.29,1464.84) 338.5,1489.05 U3F.6@458.98,1489.05
NetC1G_pos: C1G.POS L1G.2 U3G.6 | length 333
  Top Layer (.GTL) w10: v1(1200.12,1464.84) L1G.2@1250.35,1464.84
  Bottom Layer (.GBL) w10: C1G.POS@1195.2,1338.84 1200.12,1343.76 v1(1200.12,1464.84) 1224.33,1489.05 U3G.6@1344.8,1489.05
NetC1H_pos: C1H.POS L1H.2 U3H.6 | length 333
  Top Layer (.GTL) w10: v1(2085.95,1464.84) L1H.2@2136.18,1464.84
  Bottom Layer (.GBL) w10: C1H.POS@2081.02,1338.84 2085.95,1343.76 v1(2085.95,1464.84) 2110.16,1489.05 U3H.6@2230.63,1489.05
NetC1I_pos: C1I.POS L1I.2 U3I.6 | length 333
  Top Layer (.GTL) w10: v1(2971.77,1464.84) L1I.2@3022.01,1464.84
  Bottom Layer (.GBL) w10: C1I.POS@2966.85,1338.84 2971.77,1343.76 v1(2971.77,1464.84) 2995.98,1489.05 U3I.6@3116.46,1489.05
NetC1J_pos: C1J.POS L1J.2 U3J.6 | length 333
  Top Layer (.GTL) w10: v1(3857.6,1464.84) L1J.2@3907.83,1464.84
  Bottom Layer (.GBL) w10: C1J.POS@3852.68,1338.84 3857.6,1343.76 v1(3857.6,1464.84) 3881.81,1489.05 U3J.6@4002.28,1489.05
NetC1K_pos: C1K.POS L1K.2 U3K.6 | length 333
  Top Layer (.GTL) w10: v1(314.29,893.98) L1K.2@364.53,893.98
  Bottom Layer (.GBL) w10: C1K.POS@309.37,767.98 314.29,772.9 v1(314.29,893.98) 338.5,918.19 U3K.6@458.97,918.19
NetC1L_pos: C1L.POS L1L.2 U3L.6 | length 333
  Top Layer (.GTL) w10: v1(1200.12,893.98) L1L.2@1250.35,893.98
  Bottom Layer (.GBL) w10: C1L.POS@1195.2,767.98 1200.12,772.9 v1(1200.12,893.98) 1224.33,918.19 U3L.6@1344.8,918.19
NetC1M_pos: C1M.POS L1M.2 U3M.6 | length 333
  Top Layer (.GTL) w10: v1(2085.95,893.98) L1M.2@2136.18,893.98
  Bottom Layer (.GBL) w10: C1M.POS@2081.02,767.98 2085.95,772.9 v1(2085.95,893.98) 2110.16,918.19 U3M.6@2230.63,918.19
NetC1N_pos: C1N.POS L1N.2 U3N.6 | length 333
  Top Layer (.GTL) w10: v1(2971.77,893.98) L1N.2@3022.01,893.98
  Bottom Layer (.GBL) w10: C1N.POS@2966.85,767.98 2971.77,772.9 v1(2971.77,893.98) 2995.98,918.19 U3N.6@3116.46,918.19
NetC1O_pos: C1O.POS L1O.2 U3O.6 | length 333
  Top Layer (.GTL) w10: v1(3857.6,893.98) L1O.2@3907.83,893.98
  Bottom Layer (.GBL) w10: C1O.POS@3852.68,767.98 3857.6,772.9 v1(3857.6,893.98) 3881.81,918.19 U3O.6@4002.28,918.19
NetC2A_2: C2A.2 U1A.1 U2A.8 | length 209.3
  Top Layer (.GTL) w10: C2A.2@516.06,2198.82 516.06,2198.11 v1(574.12,2140.05) U1A.1@606.61,2107.56 651.89,2062.28 U2A.8@651.89,2051.65
  Bottom Layer (.GBL) w10: v1@569.98,2135.9 v1(574.12,2140.05)
NetC2B_2: C2B.2 U1B.1 U2B.8 | length 209.3
  Top Layer (.GTL) w10: C2B.2@1401.89,2198.82 1401.89,2198.11 v1(1459.95,2140.05) U1B.1@1492.44,2107.56 1537.71,2062.28 U2B.8@1537.72,2051.66
  Bottom Layer (.GBL) w10: v1@1455.8,2135.9 v1(1459.95,2140.05)
NetC2C_2: C2C.2 U1C.1 U2C.8 | length 209.3
  Top Layer (.GTL) w10: C2C.2@2287.72,2198.82 2287.72,2198.11 v1(2345.78,2140.05) U1C.1@2378.27,2107.56 2423.54,2062.28 U2C.8@2423.54,2051.65
  Bottom Layer (.GBL) w10: v1@2341.63,2135.9 v1(2345.78,2140.05)
NetC2D_2: C2D.2 U1D.1 U2D.8 | length 209.3
  Top Layer (.GTL) w10: C2D.2@3173.54,2198.82 3173.54,2198.11 v1(3231.6,2140.05) U1D.1@3264.09,2107.56 3309.37,2062.28 U2D.8@3309.37,2051.65
  Bottom Layer (.GBL) w10: v1@3227.46,2135.9 v1(3231.6,2140.05)
NetC2E_2: C2E.2 U1E.1 U2E.8 | length 209.3
  Top Layer (.GTL) w10: C2E.2@4059.37,2198.82 4059.37,2198.11 v1(4117.43,2140.05) U1E.1@4149.92,2107.56 4195.19,2062.28 U2E.8@4195.19,2051.66
  Bottom Layer (.GBL) w10: v1@4113.28,2135.9 v1(4117.43,2140.05)
NetC2F_2: C2F.2 U1F.1 U2F.8 | length 209.3
  Top Layer (.GTL) w10: C2F.2@516.06,1608.27 516.06,1607.56 v1(574.12,1549.5) U1F.1@606.61,1517.01 651.89,1471.73 U2F.8@651.89,1461.1
  Bottom Layer (.GBL) w10: v1@569.98,1545.35 v1(574.12,1549.5)
NetC2G_2: C2G.2 U1G.1 U2G.8 | length 209.3
  Top Layer (.GTL) w10: C2G.2@1401.89,1608.27 1401.89,1607.56 v1(1459.95,1549.5) U1G.1@1492.44,1517.01 1537.71,1471.73 U2G.8@1537.72,1461.1
  Bottom Layer (.GBL) w10: v1@1455.8,1545.35 v1(1459.95,1549.5)
NetC2H_2: C2H.2 U1H.1 U2H.8 | length 209.3
  Top Layer (.GTL) w10: C2H.2@2287.72,1608.27 2287.72,1607.56 v1(2345.78,1549.5) U1H.1@2378.27,1517.01 2423.54,1471.73 U2H.8@2423.54,1461.1
  Bottom Layer (.GBL) w10: v1@2341.63,1545.35 v1(2345.78,1549.5)
NetC2I_2: C2I.2 U1I.1 U2I.8 | length 209.3
  Top Layer (.GTL) w10: C2I.2@3173.54,1608.27 3173.54,1607.56 v1(3231.6,1549.5) U1I.1@3264.09,1517.01 3309.37,1471.73 U2I.8@3309.37,1461.1
  Bottom Layer (.GBL) w10: v1@3227.46,1545.35 v1(3231.6,1549.5)
NetC2J_2: C2J.2 U1J.1 U2J.8 | length 209.3
  Top Layer (.GTL) w10: C2J.2@4059.37,1608.27 4059.37,1607.56 v1(4117.43,1549.5) U1J.1@4149.92,1517.01 4195.19,1471.73 U2J.8@4195.2,1461.1
  Bottom Layer (.GBL) w10: v1@4113.28,1545.35 v1(4117.43,1549.5)
NetC2K_2: C2K.2 U1K.1 U2K.8 | length 209.3
  Top Layer (.GTL) w10: C2K.2@516.06,1037.4 516.06,1036.69 v1(574.12,978.63) U1K.1@606.61,946.14 651.89,900.87 U2K.8@651.89,890.24
  Bottom Layer (.GBL) w10: v1@569.98,974.48 v1(574.12,978.63)
NetC2L_2: C2L.2 U1L.1 U2L.8 | length 209.3
  Top Layer (.GTL) w10: C2L.2@1401.89,1037.4 1401.89,1036.69 v1(1459.95,978.63) U1L.1@1492.44,946.14 1537.71,900.87 U2L.8@1537.72,890.24
  Bottom Layer (.GBL) w10: v1@1455.8,974.48 v1(1459.95,978.63)
NetC2M_2: C2M.2 U1M.1 U2M.8 | length 209.3
  Top Layer (.GTL) w10: C2M.2@2287.72,1037.4 2287.72,1036.69 v1(2345.78,978.63) U1M.1@2378.27,946.14 2423.54,900.87 U2M.8@2423.54,890.24
  Bottom Layer (.GBL) w10: v1@2341.63,974.48 v1(2345.78,978.63)
NetC2N_2: C2N.2 U1N.1 U2N.8 | length 209.3
  Top Layer (.GTL) w10: C2N.2@3173.54,1037.4 3173.54,1036.69 v1(3231.6,978.63) U1N.1@3264.09,946.14 3309.37,900.87 U2N.8@3309.37,890.24
  Bottom Layer (.GBL) w10: v1@3227.46,974.48 v1(3231.6,978.63)
NetC2O_2: C2O.2 U1O.1 U2O.8 | length 209.3
  Top Layer (.GTL) w10: C2O.2@4059.37,1037.4 4059.37,1036.69 v1(4117.43,978.63) 4149.92,946.14 4195.19,900.87 U2O.8@4195.2,890.24
  Bottom Layer (.GBL) w10: v1@4113.28,974.48 v1(4117.43,978.63)
NetC3A_neg: C3A.NEG L2A.2 U3A.3 | length 339.5
  Top Layer (.GTL) w10: L2A.2@746.34,2055.39 746.34,2036.73 780.83,2002.24 v1(799.53,2002.24)
  Bottom Layer (.GBL) w10: U3A.3@651.89,2079.61 722.17,2079.61 v1(799.53,2002.24) 801.5,2000.28 C3A.NEG@801.5,1929.39
NetC3B_neg: C3B.NEG L2B.2 U3B.3 | length 339.5
  Top Layer (.GTL) w10: L2B.2@1632.16,2055.39 1632.16,2036.73 1666.65,2002.24 v1(1685.35,2002.24)
  Bottom Layer (.GBL) w10: U3B.3@1537.72,2079.61 1607.99,2079.61 v1(1685.35,2002.24) 1687.32,2000.28 C3B.NEG@1687.32,1929.39
NetC3C_neg: C3C.NEG L2C.2 U3C.3 | length 339.5
  Top Layer (.GTL) w10: L2C.2@2517.99,2055.39 2517.99,2036.73 2552.48,2002.24 v1(2571.18,2002.24)
  Bottom Layer (.GBL) w10: U3C.3@2423.54,2079.61 2493.82,2079.61 v1(2571.18,2002.24) 2573.15,2000.28 C3C.NEG@2573.15,1929.39
NetC3D_neg: C3D.NEG L2D.2 U3D.3 | length 339.5
  Top Layer (.GTL) w10: L2D.2@3403.82,2055.39 3403.82,2036.73 3438.31,2002.24 v1(3457.01,2002.24)
  Bottom Layer (.GBL) w10: U3D.3@3309.37,2079.61 3379.65,2079.61 v1(3457.01,2002.24) 3458.98,2000.28 C3D.NEG@3458.98,1929.39
NetC3E_neg: C3E.NEG L2E.2 U3E.3 | length 339.5
  Top Layer (.GTL) w10: L2E.2@4289.65,2055.39 4289.65,2036.73 4324.13,2002.24 v1(4342.83,2002.24)
  Bottom Layer (.GBL) w10: U3E.3@4195.19,2079.61 4265.47,2079.61 v1(4342.83,2002.24) 4344.8,2000.28 C3E.NEG@4344.8,1929.39
NetC3F_neg: C3F.NEG L2F.2 U3F.3 | length 339.5
  Top Layer (.GTL) w10: L2F.2@746.34,1464.84 746.34,1446.18 780.83,1411.69 v1(799.53,1411.69)
  Bottom Layer (.GBL) w10: U3F.3@651.89,1489.05 722.17,1489.05 v1(799.53,1411.69) 801.5,1409.72 C3F.NEG@801.5,1338.84
NetC3G_neg: C3G.NEG L2G.2 U3G.3 | length 339.5
  Top Layer (.GTL) w10: L2G.2@1632.16,1464.84 1632.16,1446.18 1666.65,1411.69 v1(1685.35,1411.69)
  Bottom Layer (.GBL) w10: U3G.3@1537.72,1489.05 1607.99,1489.05 v1(1685.35,1411.69) 1687.32,1409.72 C3G.NEG@1687.32,1338.84
NetC3H_neg: C3H.NEG L2H.2 U3H.3 | length 339.5
  Top Layer (.GTL) w10: L2H.2@2517.99,1464.84 2517.99,1446.18 2552.48,1411.69 v1(2571.18,1411.69)
  Bottom Layer (.GBL) w10: U3H.3@2423.54,1489.05 2493.82,1489.05 v1(2571.18,1411.69) 2573.15,1409.72 C3H.NEG@2573.15,1338.84
NetC3I_neg: C3I.NEG L2I.2 U3I.3 | length 339.5
  Top Layer (.GTL) w10: L2I.2@3403.82,1464.84 3403.82,1446.18 3438.31,1411.69 v1(3457.01,1411.69)
  Bottom Layer (.GBL) w10: U3I.3@3309.37,1489.05 3379.65,1489.05 v1(3457.01,1411.69) 3458.98,1409.72 C3I.NEG@3458.98,1338.84
NetC3J_neg: C3J.NEG L2J.2 U3J.3 | length 339.5
  Top Layer (.GTL) w10: L2J.2@4289.65,1464.84 4289.65,1446.18 4324.13,1411.69 v1(4342.83,1411.69)
  Bottom Layer (.GBL) w10: U3J.3@4195.2,1489.05 4265.47,1489.05 v1(4342.83,1411.69) 4344.8,1409.72 C3J.NEG@4344.8,1338.84
NetC3K_neg: C3K.NEG L2K.2 U3K.3 | length 339.5
  Top Layer (.GTL) w10: L2K.2@746.34,893.98 746.34,875.31 780.83,840.83 v1(799.53,840.83)
  Bottom Layer (.GBL) w10: U3K.3@651.89,918.19 722.17,918.19 v1(799.53,840.83) 801.5,838.86 C3K.NEG@801.5,767.98
NetC3L_neg: C3L.NEG L2L.2 U3L.3 | length 339.5
  Top Layer (.GTL) w10: L2L.2@1632.16,893.98 1632.16,875.31 1666.65,840.83 v1(1685.35,840.83)
  Bottom Layer (.GBL) w10: U3L.3@1537.72,918.19 1607.99,918.19 v1(1685.35,840.83) 1687.32,838.86 C3L.NEG@1687.32,767.98
NetC3M_neg: C3M.NEG L2M.2 U3M.3 | length 339.5
  Top Layer (.GTL) w10: L2M.2@2517.99,893.98 2517.99,875.31 2552.48,840.83 v1(2571.18,840.83)
  Bottom Layer (.GBL) w10: U3M.3@2423.54,918.19 2493.82,918.19 v1(2571.18,840.83) 2573.15,838.86 C3M.NEG@2573.15,767.98
NetC3N_neg: C3N.NEG L2N.2 U3N.3 | length 339.5
  Top Layer (.GTL) w10: L2N.2@3403.82,893.98 3403.82,875.31 3438.31,840.83 v1(3457.01,840.83)
  Bottom Layer (.GBL) w10: U3N.3@3309.37,918.19 3379.65,918.19 v1(3457.01,840.83) 3458.98,838.86 C3N.NEG@3458.98,767.98
NetC3O_neg: C3O.NEG L2O.2 U3O.3 | length 339.5
  Top Layer (.GTL) w10: L2O.2@4289.65,893.98 4289.65,875.31 4324.13,840.83 v1(4342.83,840.83)
  Bottom Layer (.GBL) w10: U3O.3@4195.2,918.19 4265.47,918.19 v1(4342.83,840.83) 4344.8,838.86 C3O.NEG@4344.8,767.98
NetC5A_pos: C5A.POS L3A.2 U6A.6 | length 607
  Top Layer (.GTL) w10: v1(932.4,2688.31) L3A.2@932.4,2753.31
  Bottom Layer (.GBL) w10: U6A.6@602.4,2576.85 602.4,2541.69 635.79,2508.31 662.4,2508.31 857.4,2703.31 ; C5A.POS@857.4,2779.31 857.4,2703.31 ; v1(932.4,2688.31) 917.4,2703.31 857.4,2703.31
NetC5B_pos: C5B.POS L3B.2 U6B.6 | length 607
  Top Layer (.GTL) w10: v1(2005.24,2688.31) L3B.2@2005.24,2753.31
  Bottom Layer (.GBL) w10: U6B.6@1675.24,2576.85 1675.24,2541.69 1708.62,2508.31 1735.24,2508.31 1930.24,2703.31 ; C5B.POS@1930.24,2779.31 1930.24,2703.31 ; v1(2005.24,2688.31) 1990.24,2703.31 1930.24,2703.31
NetC5C_pos: C5C.POS L3C.2 U6C.6 | length 607
  Top Layer (.GTL) w10: v1(3078.07,2688.31) L3C.2@3078.07,2753.31
  Bottom Layer (.GBL) w10: U6C.6@2748.07,2576.85 2748.07,2541.69 2781.46,2508.31 2808.07,2508.31 3003.07,2703.31 ; C5C.POS@3003.07,2779.31 3003.07,2703.31 ; v1(3078.07,2688.31) 3063.07,2703.31 3003.07,2703.31
NetC5D_pos: C5D.POS L3D.2 U6D.6 | length 607
  Top Layer (.GTL) w10: v1(4150.91,2688.31) L3D.2@4150.91,2753.31
  Bottom Layer (.GBL) w10: U6D.6@3820.91,2576.85 3820.91,2541.69 3854.29,2508.31 3880.91,2508.31 4075.91,2703.31 ; C5D.POS@4075.91,2779.31 4075.91,2703.31 ; v1(4150.91,2688.31) 4135.9,2703.31 4075.91,2703.31
NetC8A_neg: C8A.NEG L4A.2 U6A.3 | length 469.9
  Top Layer (.GTL) w10: v1(377.4,2643.31) 412.4,2643.31 L4A.2@422.4,2653.31 v1(602.4,2653.31)
  Bottom Layer (.GBL) w10: C8A.NEG@357.4,2527.31 377.4,2547.31 v1(377.4,2643.31) ; v1(602.4,2653.31) U6A.3@602.4,2769.76
NetC8B_neg: C8B.NEG L4B.2 U6B.3 | length 469.9
  Top Layer (.GTL) w10: v1(1450.24,2643.31) 1485.24,2643.31 L4B.2@1495.24,2653.31 v1(1675.24,2653.31)
  Bottom Layer (.GBL) w10: C8B.NEG@1430.24,2527.31 1450.24,2547.31 v1(1450.24,2643.31) ; v1(1675.24,2653.31) U6B.3@1675.24,2769.76
NetC8C_neg: C8C.NEG L4C.2 U6C.3 | length 469.9
  Top Layer (.GTL) w10: v1(2523.07,2643.31) 2558.07,2643.31 L4C.2@2568.07,2653.31 v1(2748.07,2653.31)
  Bottom Layer (.GBL) w10: C8C.NEG@2503.07,2527.31 2523.07,2547.31 v1(2523.07,2643.31) ; v1(2748.07,2653.31) U6C.3@2748.07,2769.76
NetC8D_neg: C8D.NEG L4D.2 U6D.3 | length 469.9
  Top Layer (.GTL) w10: v1(3595.91,2643.31) 3630.91,2643.31 L4D.2@3640.91,2653.31 v1(3820.91,2653.31)
  Bottom Layer (.GBL) w10: C8D.NEG@3575.91,2527.31 3595.91,2547.31 v1(3595.91,2643.31) ; v1(3820.91,2653.31) U6D.3@3820.91,2769.76
NetC10A_1: C10A.1 R7A.1 R8A.2 U8A.8 | length 330.5
  Top Layer (.GTL) w10: R8A.2@299.29,3519.41 352.44,3572.56 v1(352.44,3598.43)
  Bottom Layer (.GBL) w10: v1(352.44,3598.43) 307.44,3598.43 R7A.1@299.29,3606.58 299.29,3520.82 310.07,3510.04 U8A.8@381.97,3510.04
NetC10A_2: C10A.2 Q1A.1 U8A.7 | length 256.3
  Top Layer (.GTL) w10: Q1A.1@395.75,3519.68 v1(442.99,3519.69)
  Bottom Layer (.GBL) w10: C10A.2@300.7,3429.41 331.33,3460.04 U8A.7@381.97,3460.04 433.54,3460.04 442.99,3469.49 v1(442.99,3519.69)
NetC10B_1: C10B.1 R7B.1 R8B.2 U8B.8 | length 330.5
  Top Layer (.GTL) w10: R8B.2@1086.69,3519.41 1139.84,3572.56 v1(1139.84,3598.43)
  Bottom Layer (.GBL) w10: v1(1139.84,3598.43) 1094.84,3598.43 R7B.1@1086.69,3606.58 1086.69,3520.82 1097.48,3510.04 U8B.8@1169.37,3510.04
NetC10B_2: C10B.2 Q1B.1 U8B.7 | length 256.3
  Top Layer (.GTL) w10: Q1B.1@1183.15,3519.68 v1(1230.39,3519.69)
  Bottom Layer (.GBL) w10: C10B.2@1088.11,3429.41 1118.74,3460.04 U8B.7@1169.37,3460.04 1220.94,3460.04 1230.39,3469.49 v1(1230.39,3519.69)
NetC10C_1: C10C.1 R7C.1 R8C.2 U8C.8 | length 330.5
  Top Layer (.GTL) w10: R8C.2@1874.09,3519.41 1927.24,3572.56 v1(1927.24,3598.43)
  Bottom Layer (.GBL) w10: v1(1927.24,3598.43) 1882.24,3598.43 R7C.1@1874.09,3606.58 1874.09,3520.82 1884.88,3510.04 U8C.8@1956.77,3510.04
NetC10C_2: C10C.2 Q1C.1 U8C.7 | length 256.3
  Top Layer (.GTL) w10: Q1C.1@1970.55,3519.68 v1(2017.8,3519.69)
  Bottom Layer (.GBL) w10: C10C.2@1875.51,3429.41 1906.14,3460.04 U8C.7@1956.77,3460.04 2008.35,3460.04 2017.8,3469.49 v1(2017.8,3519.69)
NetC10D_1: C10D.1 R7D.1 R8D.2 U8D.8 | length 330.5
  Top Layer (.GTL) w10: R8D.2@2661.5,3519.41 2714.65,3572.56 v1(2714.65,3598.43)
  Bottom Layer (.GBL) w10: v1(2714.65,3598.43) 2669.65,3598.43 R7D.1@2661.5,3606.58 2661.5,3520.82 2672.28,3510.04 U8D.8@2744.17,3510.04
NetC10D_2: C10D.2 Q1D.1 U8D.7 | length 256.3
  Top Layer (.GTL) w10: Q1D.1@2757.95,3519.68 v1(2805.2,3519.69)
  Bottom Layer (.GBL) w10: C10D.2@2662.91,3429.41 2693.54,3460.04 U8D.7@2744.17,3460.04 2795.75,3460.04 2805.2,3469.49 v1(2805.2,3519.69)
NetC10E_1: C10E.1 R7E.1 R8E.2 U8E.8 | length 330.5
  Top Layer (.GTL) w10: R8E.2@3448.9,3519.41 3502.05,3572.56 v1(3502.05,3598.43)
  Bottom Layer (.GBL) w10: v1(3502.05,3598.43) 3457.05,3598.43 R7E.1@3448.9,3606.58 3448.9,3520.82 3459.68,3510.04 U8E.8@3531.57,3510.04
NetC10E_2: C10E.2 Q1E.1 U8E.7 | length 256.3
  Top Layer (.GTL) w10: Q1E.1@3545.35,3519.68 v1(3592.6,3519.69)
  Bottom Layer (.GBL) w10: C10E.2@3450.31,3429.41 3480.94,3460.04 U8E.7@3531.57,3460.04 3583.15,3460.04 3592.6,3469.49 v1(3592.6,3519.69)
NetC10F_1: C10F.1 R7F.1 R8F.2 U8F.8 | length 330.5
  Top Layer (.GTL) w10: R8F.2@4236.3,3519.41 4289.45,3572.56 v1(4289.45,3598.43)
  Bottom Layer (.GBL) w10: v1(4289.45,3598.43) 4244.45,3598.43 R7F.1@4236.3,3606.58 4236.3,3520.82 4247.08,3510.04 U8F.8@4318.97,3510.04
NetC10F_2: C10F.2 Q1F.1 U8F.7 | length 256.3
  Top Layer (.GTL) w10: Q1F.1@4332.75,3519.68 v1(4380,3519.69)
  Bottom Layer (.GBL) w10: C10F.2@4237.71,3429.41 4268.34,3460.04 U8F.7@4318.97,3460.04 4370.55,3460.04 4380,3469.49 v1(4380,3519.69)
NetC15A_1: C15A.1 R9A.2 R10A.1 U8A.4 | length 362.7
  Top Layer (.GTL) w10: R10A.1@663.46,3340.83 740.17,3340.83 v1(752,3329)
  Bottom Layer (.GBL) w10: U8A.4@570.94,3360.04 645.67,3360.04 C15A.1@664.88,3340.83 664.88,3270.55 R9A.2@663.46,3269.13 ; R9A.2@676.33,3282 705,3282 v1(752,3329)
NetC15A_2: C15A.2 Q2A.1 U8A.5 | length 390.6
  Top Layer (.GTL) w10: Q2A.1@576.85,3350.4 611.5,3350.39 623.28,3362.18 v1(623.28,3389.23)
  Bottom Layer (.GBL) w10: U8A.5@381.97,3360.04 437.87,3360.04 467.06,3389.23 v1(623.28,3389.23) C15A.2@664.88,3430.83
NetC15B_1: C15B.1 R9B.2 R10B.1 U8B.4 | length 362.5
  Top Layer (.GTL) w10: R10B.1@1450.87,3340.83 1452.69,3339 v1(1545,3339)
  Bottom Layer (.GBL) w10: U8B.4@1358.35,3360.04 1433.07,3360.04 C15B.1@1452.28,3340.83 ; R9B.2@1450.87,3269.13 1452.28,3270.55 C15B.1@1452.28,3340.83 ; v1(1545,3339) 1543.17,3340.83 C15B.1@1452.28,3340.83
NetC15B_2: C15B.2 Q2B.1 U8B.5 | length 390.6
  Top Layer (.GTL) w10: Q2B.1@1364.25,3350.4 1398.9,3350.39 1410.68,3362.18 v1(1410.68,3389.23)
  Bottom Layer (.GBL) w10: U8B.5@1169.37,3360.04 1225.28,3360.04 1254.46,3389.23 v1(1410.68,3389.23) C15B.2@1452.28,3430.83